# Altium PCB PCB_Bat.PcbDoc (part 2 of 2)
Units mm, origin at the board's own origin, x right, y up, seen from the top; angles counter-clockwise.
Board outline 154 x 85 mm, 2 copper layers (Top Layer, Bottom Layer); 134 components, 100 nets, 509 pads, 1285 vias.
Unrouted connection lines stored in the file: 8.
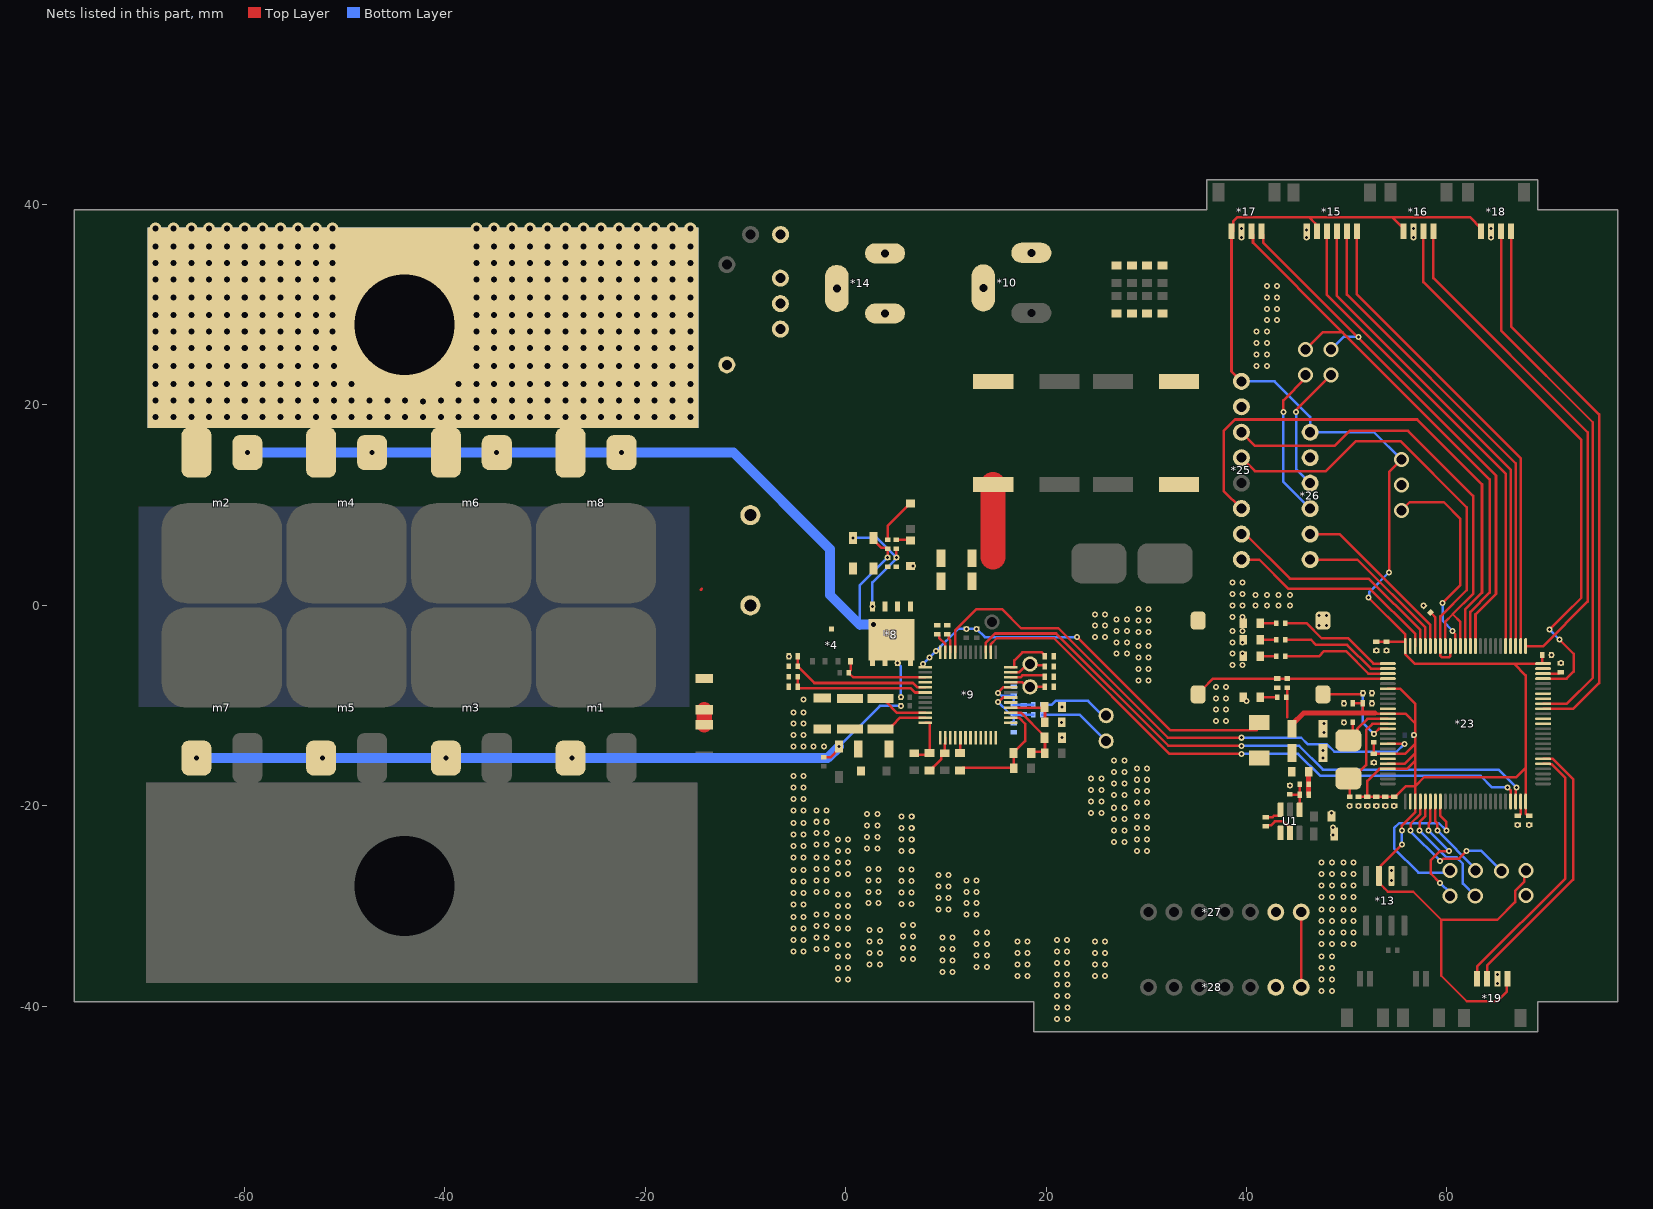
[diagram p2: the nets of this part, all layers, seen from the top]

## Via types
v1: diameter 1.2, hole 0.6, Top Layer to Bottom Layer, 768 vias
v2: diameter 0.6, hole 0.3, Top Layer to Bottom Layer, 477 vias
v3: diameter 1.5, hole 1, Top Layer to Bottom Layer, 20 vias
v4: diameter 1, hole 0.5, Top Layer to Bottom Layer, 9 vias
v5: diameter 3.5, hole 3, Top Layer to Bottom Layer, 6 vias
v6: diameter 1.27, hole 0.711, Top Layer to Bottom Layer, 5 vias

## Nets (pads, with @x,y where several pads share a name; then routed paths per layer and width w, separated by ;. In a path a pad name is that pad's centre, name@x,y a point inside that pad or via, vN(x,y) a via of type N, cw(c..) or ccw(c..) an arc to the next point about the centre after c; other vN are vias at no path point) (continued)
GND: *5.1 *9.17 *10.1 *10.2 *12.2 *13.2 *14.1 *14.2 *15.6 *16.3 *17.3 *18.3 *19.3 *21.2 *23.10 *23.20 *23.27 *23.74 *23.99 *25.2 *26.2 *27.1 *28.1 *29.2 C1.2 C2.2 C3.2 C4.2 C5.1 C6.1 C7.1 C8.1 C9.1 C10.1 C11.1 C12.1 C13.1 C14.2 C16.1 C18.1 C19.1 C22.2 C23.2 C25.1 C26.2 C27.1 C28.2 C29.1 C33.2 C35.1 C36.1 C37.1 C38.1 C39.1 C40.1 C41.1 C42.1 C43.1 C44.2 C45.1 C46.1 C47.1 C48.2 C49.1 C50.1 C51.1 C52.1 C53.1 C54.1 C55.1 C56.1 L2.1 L3.1 L4.1 L5.1 pad.8@45.466,-30.607 pad.8@45.466,-38.1 pad.9@-6.5,27.563 pad.9@-6.5,30.103 pad.9@-6.5,32.643 pad.9@-6.477,37 R16.1 R17.2 R24.1 RPH1.2 RPH2.1 U1.1 | length 14.7
  Top Layer w0.254: pad.8@45.466,-38.1 pad.8@45.466,-30.607
  Top Layer w2.5: 14.732,4.826 C1.2@14.732,12.065
  other v2: 21.108,-41.255 22.124,-41.255 21.108,-40.112 22.124,-40.112 21.108,-38.969 22.124,-38.969 47.498,-38.481 48.514,-38.481 21.108,-37.826 22.124,-37.826 65.024,-37.719 -0.762,-37.338 0.254,-37.338 47.498,-37.338 48.514,-37.338 17.145,-36.957 18.161,-36.957 24.892,-36.957 25.908,-36.957 21.082,-36.83 22.098,-36.83 65.024,-36.83 9.652,-36.576 10.668,-36.576 -0.762,-36.195 0.254,-36.195 47.498,-36.195 48.514,-36.195 13.081,-36.068 14.097,-36.068 2.413,-35.814 3.429,-35.814 17.145,-35.814 18.161,-35.814 24.892,-35.814 25.908,-35.814 21.082,-35.687 22.098,-35.687 9.652,-35.433 10.668,-35.433 5.715,-35.306 6.731,-35.306 -0.762,-35.052 0.254,-35.052 47.498,-35.052 48.514,-35.052 13.081,-34.925 14.097,-34.925 2.413,-34.671 3.429,-34.671 17.145,-34.671 18.161,-34.671 24.892,-34.671 25.908,-34.671 -5.207,-34.544 -4.191,-34.544 21.082,-34.544 22.098,-34.544 -2.921,-34.29 -1.905,-34.29 9.652,-34.29 10.668,-34.29 5.715,-34.163 6.731,-34.163 -0.762,-33.909 0.254,-33.909 13.081,-33.782 14.097,-33.782 47.498,-33.782 48.514,-33.782 49.657,-33.782 50.673,-33.782 2.413,-33.528 3.429,-33.528 17.145,-33.528 18.161,-33.528 24.892,-33.528 25.908,-33.528 -5.207,-33.401 -4.191,-33.401 21.082,-33.401 22.098,-33.401 -2.921,-33.147 -1.905,-33.147 9.652,-33.147 10.668,-33.147 5.715,-33.02 6.731,-33.02 13.081,-32.639 14.097,-32.639 47.498,-32.639 48.514,-32.639 49.657,-32.639 50.673,-32.639 2.413,-32.385 3.429,-32.385 -5.207,-32.258 -4.191,-32.258 -0.762,-32.258 0.254,-32.258 -2.921,-32.004 -1.905,-32.004 5.715,-31.877 6.731,-31.877 47.498,-31.496 48.514,-31.496 49.657,-31.496 50.673,-31.496 -5.207,-31.115 -4.191,-31.115 -0.762,-31.115 0.254,-31.115 -2.921,-30.861 -1.905,-30.861 12.065,-30.861 13.081,-30.861 9.271,-30.353 10.287,-30.353 47.498,-30.353 48.514,-30.353 49.657,-30.353 50.673,-30.353 -0.762,-29.972 0.254,-29.972 -5.207,-29.845 -4.191,-29.845 5.579,-29.805 6.595,-29.805 2.286,-29.718 3.302,-29.718 12.065,-29.718 13.081,-29.718 9.271,-29.21 10.287,-29.21 47.498,-29.083 48.514,-29.083 49.657,-29.083 50.673,-29.083 -0.762,-28.829 0.254,-28.829 -5.207,-28.702 -4.191,-28.702 5.579,-28.662 6.595,-28.662 -2.921,-28.575 -1.905,-28.575 2.286,-28.575 3.302,-28.575 12.065,-28.575 13.081,-28.575 9.271,-28.067 10.287,-28.067 47.498,-27.94 48.514,-27.94 49.657,-27.94 50.673,-27.94 -5.207,-27.559 -4.191,-27.559 5.579,-27.519 6.595,-27.519 -2.921,-27.432 -1.905,-27.432 2.286,-27.432 3.302,-27.432 12.065,-27.432 13.081,-27.432 54.483,-27.432 9.271,-26.924 10.287,-26.924 -0.762,-26.797 0.254,-26.797 47.498,-26.797 48.514,-26.797 49.657,-26.797 50.673,-26.797 54.489,-26.468 -5.207,-26.416 -4.191,-26.416 5.579,-26.376 6.595,-26.376 -2.921,-26.289 -1.905,-26.289 2.286,-26.289 3.302,-26.289 -0.762,-25.654 0.254,-25.654 47.498,-25.654 48.514,-25.654 49.657,-25.654 50.673,-25.654 -5.207,-25.146 -4.191,-25.146 -2.921,-25.146 -1.905,-25.146 -0.762,-24.511 0.254,-24.511 5.588,-24.511 6.604,-24.511 29.083,-24.511 30.099,-24.511 2.159,-24.257 3.175,-24.257 -5.207,-24.003 -4.191,-24.003 -2.921,-23.876 -1.905,-23.876 26.797,-23.622 27.813,-23.622 -0.762,-23.368 0.254,-23.368 5.588,-23.368 6.604,-23.368 29.083,-23.368 30.099,-23.368 2.159,-23.114 3.175,-23.114 48.65,-22.931 -5.207,-22.86 -4.191,-22.86 -2.921,-22.733 -1.905,-22.733 26.797,-22.479 27.813,-22.479 5.588,-22.225 6.604,-22.225 29.083,-22.225 30.099,-22.225 48.65,-22.169 2.159,-21.971 3.175,-21.971 67.056,-21.913 68.199,-21.913 -5.207,-21.717 -4.191,-21.717 -2.921,-21.59 -1.905,-21.59 26.797,-21.336 27.813,-21.336 5.588,-21.082 6.604,-21.082 29.083,-21.082 30.099,-21.082 2.159,-20.828 3.175,-20.828 24.511,-20.701 25.527,-20.701 48.5,-20.701 -5.207,-20.447 -4.191,-20.447 -2.921,-20.447 -1.905,-20.447 26.797,-20.193 27.813,-20.193 50.292,-20.008 51.181,-20.008 52.07,-20.008 52.959,-20.008 53.848,-20.008 54.737,-20.008 29.083,-19.685 30.099,-19.685 24.511,-19.558 25.527,-19.558 -5.207,-19.304 -4.191,-19.304 26.797,-18.923 27.813,-18.923 29.083,-18.542 30.099,-18.542 24.511,-18.415 25.527,-18.415 -5.207,-18.161 -4.191,-18.161 44.323,-17.965 26.797,-17.78 27.813,-17.78 29.083,-17.399 30.099,-17.399 24.511,-17.272 25.527,-17.272 -5.207,-17.018 -4.191,-17.018 26.797,-16.637 27.813,-16.637 29.083,-16.256 30.099,-16.256 52.705,-15.69 26.797,-15.494 27.813,-15.494 47.625,-15.24 47.625,-14.47 -5.207,-14.097 -4.191,-14.097 -3.175,-14.097 -2.159,-14.097 21.576,-13.208 -5.207,-12.954 -4.191,-12.954 47.752,-12.7 -5.207,-11.811 -4.191,-11.811 47.752,-11.811 21.551,-11.684 49.715,-11.684 36.957,-11.557 37.973,-11.557 -5.207,-10.668 -4.191,-10.668 36.957,-10.414 37.973,-10.414 21.576,-10.16 49.715,-9.779 52.52,-9.779 40.005,-9.525 -4.191,-9.398 36.957,-9.271 37.973,-9.271 52.52,-8.763 36.957,-8.128 37.973,-8.128 29.21,-7.493 30.226,-7.493 29.21,-6.35 30.226,-6.35 38.608,-5.969 39.624,-5.969 71.374,-5.773 29.21,-5.207 30.226,-5.207 -5.657,-5.08 70.427,-4.953 27.051,-4.826 28.067,-4.826 38.608,-4.826 39.624,-4.826 52.959,-4.514 53.975,-4.514 29.21,-4.064 30.226,-4.064 27.051,-3.683 28.067,-3.683 38.608,-3.683 39.624,-3.683 24.892,-3.175 25.908,-3.175 29.21,-2.667 30.226,-2.667 27.051,-2.54 28.067,-2.54 38.608,-2.54 39.624,-2.54 24.892,-2.032 25.908,-2.032 47.244,-2.032 48.006,-2.032 29.21,-1.524 30.226,-1.524 27.051,-1.397 28.067,-1.397 38.608,-1.143 39.624,-1.143 47.244,-1.016 48.006,-1.016 24.892,-0.889 25.908,-0.889 29.21,-0.381 30.226,-0.381 38.608,0 39.624,0 40.894,0 42.037,0 43.18,0 44.323,0 57.658,0 40.894,1.016 42.037,1.016 43.18,1.016 44.323,1.016 38.608,1.143 39.624,1.143 38.608,2.286 39.624,2.286 6.731,3.937 41.021,23.876 42.037,23.876 41.021,25.019 42.037,25.019 41.021,26.162 42.037,26.162 41.021,27.305 42.037,27.305 42.037,28.448 43.053,28.448 42.037,29.591 43.053,29.591 42.037,30.734 43.053,30.734 42.037,31.877 43.053,31.877 39.497,36.703 45.974,36.703 56.642,36.703 64.389,36.703 45.974,37.465 39.497,37.592 56.642,37.592 64.389,37.592
  other v3: 67.873,-28.967 55.446,12
I2C1_SCL/SPI1_SCK: *23.89 *23.92 *25.3 | length 46.6
  Top Layer w0.254: *25.3@39.497,17.272 40.86,15.909 48.802,15.909 50.292,17.399 56.134,17.399 62.611,10.922 62.611,1.15 60.579,-0.882 60.579,-0.889 ; *23.92@59.849,-4.061 59.849,-1.619 60.579,-0.889 ; *23.89@61.349,-4.061 61.349,-1.659 60.579,-0.889
I2C1_SDA/SPI1_MOSI: *23.91 *23.93 *25.4 | length 45
  Top Layer w0.254: *25.4@39.497,14.732 40.842,13.387 47.931,13.387 50.927,16.383 55.372,16.383 61.976,9.779 61.976,1.524 59.349,-1.103 *23.93@59.349,-4.061 59.349,-5.04 59.498,-5.189 60.195,-5.189 60.344,-5.04 60.344,-4.066 *23.91@60.349,-4.061
I2C2_SCL: *9.26 *23.47 | length 60.3
  Top Layer w0.254: *9.26@14.468,-4.669 14.468,-3.9 15.085,-3.283 20.816,-3.283 32.341,-14.808 v2(39.497,-14.808) ; v2(66.04,-18.161) 66.349,-18.47 *23.47@66.349,-19.561
  Bottom Layer w0.254: v2(39.497,-14.808) 45.161,-14.808 47.371,-17.018 63.373,-17.018 64.516,-18.161 v2(66.04,-18.161)
I2C2_SDA: *9.27 *23.48 | length 62.1
  Top Layer w0.254: *9.27@13.968,-4.669 13.968,-3.758 14.919,-2.807 21.013,-2.807 32.214,-14.008 v2(39.497,-14.008) ; *23.48@66.849,-19.561 66.849,-18.335 66.929,-18.255 v2(66.929,-18.161)
  Bottom Layer w0.254: v2(39.497,-14.008) 45.25,-14.008 47.625,-16.383 65.151,-16.383 v2(66.929,-18.161)
I2C3_SCL: *18.2 *23.67 | length 54.2
  Top Layer w0.254: *18.2@65.403,37.141 65.403,27.417 74.549,18.271 74.549,-7.239 71.977,-9.811 *23.67@69.599,-9.811
I2C3_SDA: *18.1 *23.66 | length 55.2
  Top Layer w0.254: *18.1@66.403,37.141 66.403,27.831 75.184,19.05 75.184,-7.747 72.62,-10.311 *23.66@69.599,-10.311
INT: *23.95 *26.5 | length 17.9
  Top Layer w0.254: *26.5@46.355,7.112 49.276,7.112 58.349,-1.961 *23.95@58.349,-4.061
INT1: *23.97 *25.7 | length 23.4
  Top Layer w0.254: *25.7@39.497,7.112 39.878,7.112 44.323,2.667 52.197,2.667 57.344,-2.48 57.344,-4.056 *23.97@57.349,-4.061
INT2: *23.98 *25.8 | length 21.6
  Top Layer w0.254: *25.8@39.497,4.572 41.275,4.572 44.196,1.651 52.324,1.651 56.844,-2.869 56.844,-4.056 *23.98@56.849,-4.061
IRQ: *23.33 | length 17.6
  Top Layer w0.254: *23.33@59.349,-19.561 59.349,-21.012 59.944,-21.607 v2(59.944,-22.479)
  Bottom Layer w0.254: v2(59.944,-22.479) 59.182,-21.717 55.245,-21.717 54.737,-22.225 54.737,-24.257 57.15,-26.67 60.115,-26.67 v3(60.325,-26.46)
KEY1: *23.4 *29.1 C56.2 R30.2 | length 19
  Top Layer w0.254: *29.1@35.587,-8.398 36.674,-7.311 *23.4@54.099,-7.311
L2: *23.3 R27.2 | length 11.4
  Top Layer w0.254: R27.2@43.884,-5.08 47.244,-5.08 47.752,-4.572 49.911,-4.572 52.15,-6.811 *23.3@54.099,-6.811
L3: *23.2 R29.1 | length 11.4
  Top Layer w0.254: R29.1@43.884,-3.429 46.438,-3.429 46.946,-3.937 50.038,-3.937 52.412,-6.311 *23.2@54.099,-6.311
L4: *23.1 R31.1 | length 11.9
  Top Layer w0.254: R31.1@43.884,-1.778 45.986,-1.778 47.51,-3.302 50.165,-3.302 52.674,-5.811 *23.1@54.099,-5.811
LD: *9.41 C16.2 R12.1 | length 14.6
  Top Layer w0.254: R12.1@-4.757,-6.146 -4.659,-6.244 -4.609,-6.244 -3.106,-7.747 6.73,-7.747 7.175,-8.192 *9.41@7.944,-8.192 ; R12.1@-4.757,-6.096 C16.2@-4.757,-5.08
Net*1_2: *1.2 R1.2 | length 4.6
  Top Layer w0.254: R1.2@4.191,6.546 4.191,7.924 6.427,10.16 *1.2@6.477,10.16
Net*2_1: *2.1 R4.1
Net*3_1: *3.1 *8.2 m2.G m4.G m6.G m8.G R1.1 R2.1 R3.2 | length 86.9
  Top Layer w0.254: *3.1@2.794,6.731 2.794,6.531 3.581,5.744 4.093,5.744 R1.1@4.191,5.646 v2(4.191,4.768)
  Bottom Layer w0.254: 1.397,-2.314 1.397,1.974 v2(4.191,4.768) ; v2(5.207,-5.764) 5.207,-5.774 5.519,-6.086 v2(5.519,-9.144)
  Bottom Layer w1: v4(-59.69,15.24) v4(-22.352,15.24) -11.176,15.24 -1.541,5.605 -1.541,1.033 1.397,-1.905 v4(2.794,-1.905)
  other v4: -47.249,15.253 -34.803,15.253
Net*5_2: *5.2 *9.47 *11.2 C13.2 R4.2 | length 5
  Top Layer w0.254: *11.2@3.498,-12.573 4.094,-12.573 4.671,-11.996 4.671,-11.966 5.444,-11.193 *9.47@7.944,-11.193
Net*6_1: *6.1 m1.G m3.G m5.G m7.G R5.2 R6.2 | length 74.5
  Top Layer w0.254: R6.2@-2.159,-15.171 -2.153,-15.165 -1.503,-15.165 -0.635,-14.297 v2(-0.635,-14.097)
  Bottom Layer w0.254: v4(-64.775,-15.227) v4@-64.768,-15.234 ; v4@-27.311,-15.234 v4(-27.305,-15.24) ; v2(-0.635,-14.097) 3.429,-10.033 v2(5.519,-10.033)
  Bottom Layer w1: v4@-64.768,-15.234 v4@-27.311,-15.234 ; v4(-27.305,-15.24) -1.778,-15.24 v2(-0.635,-14.097)
  other v4: -52.202,-15.227 -39.883,-15.227
Net*7_1: *7.1 *8.1 R7.1 R9.2 | length 11.8
  Top Layer w0.254: v2(5.08,4.768) R9.2@5.08,5.646
  Bottom Layer w0.254: v2(0.762,6.731) 3.117,6.731 v2(5.08,4.768) ; v2@2.667,-0.129 2.667,2.286 v2@5.076,4.695
  other v2: 2.667,-0.096
Net*9_1: *9.1 *9.2 *9.3 *9.4 *9.5 *9.6 *9.7 *9.8 *9.9 *9.10 *9.11 *9.12 *9.13 C15.2 C17.2 R10.2 | length 5.8
  Top Layer w0.254: C15.2@8.382,-16.496 8.482,-16.496 8.755,-16.223 8.755,-16.123 9.558,-15.32 9.558,-15.019 9.704,-14.873 9.906,-14.873 9.906,-13.829 9.967,-13.769 *9.2@9.967,-13.216 ; C17.2@11.43,-14.898 11.43,-13.806 11.467,-13.769 *9.5@11.467,-13.216
Net*9_14: *9.14 C17.1 C24.2 R14.2 | length 12
  Top Layer w0.254: C17.1@11.43,-16.496 11.703,-16.223 16.709,-16.223 16.803,-16.129 16.803,-14.63 C24.2@16.778,-14.605 ; *9.14@16.491,-11.193 17.289,-11.193 17.907,-11.811 17.907,-13.537 C24.2@16.843,-14.6
Net*9_15: *9.15 C24.1 C25.2 R15.2 | length 7.2
  Top Layer w0.254: *9.15@16.491,-10.693 17.503,-10.693 19.874,-13.063 19.874,-13.163 19.899,-13.188 19.899,-14.6 C24.1@18.593,-14.6
Net*9_16: *9.16 C27.2 R16.2 | length 4.9
  Top Layer w0.254: *9.16@16.491,-10.193 19.777,-10.193 19.899,-10.315 R16.2@19.899,-11.726
Net*9_24: *9.24 C39.2 | length 4.6
  Top Layer w0.254: *9.24@16.491,-6.192 16.85,-6.192 16.85,-5.502 17.653,-4.699 19.584,-4.699 19.87,-4.985 C39.2@19.87,-5.08
Net*9_34: *9.34 C23.1 | length 2
  Top Layer w0.254: C23.1@10.16,-2.863 10.194,-2.863 10.292,-2.961 10.292,-3.307 10.467,-3.482 *9.34@10.467,-4.669
Net*9_35: *9.35 C22.1 | length 2.2
  Top Layer w0.254: C22.1@9.144,-2.863 9.239,-2.863 9.337,-2.961 9.337,-3.241 9.967,-3.871 *9.35@9.967,-4.669
Net*9_46: *9.46 *11.1 | length 4.6
  Top Layer w0.254: *11.1@4.064,-9.398 4.064,-9.652 5.105,-10.693 *9.46@7.944,-10.693
Net*9_48: *9.48 C15.1 R11.1 | length 5.2
  Top Layer w0.254: R11.1@6.858,-14.898 8.357,-14.898 8.382,-14.873 8.382,-11.693 *9.48@7.944,-11.693
Net*12_1: *12.1 R9.1 | length 1.4
  Top Layer w0.254: R9.1@5.08,6.546 6.408,6.546 *12.1@6.477,6.477
Net*21_1: *21.1 *23.14 C48.1 R25.1 | length 10.2
  Top Layer w0.254: *21.1@47.625,-8.89 51.522,-8.89 51.62,-8.792 v2(51.62,-8.763) ; R25.1@52.705,-12.808 52.853,-12.66 52.872,-12.66 53.216,-12.316 54.094,-12.316 *23.14@54.099,-12.311
  Bottom Layer w0.254: v2(51.62,-8.763) 51.62,-11.742 v2(52.705,-12.827)
Net*23_49: *23.49 C42.2 | length 1.6
  Top Layer w0.254: C42.2@67.056,-21.013 67.151,-21.013 67.349,-20.815 *23.49@67.349,-19.561
Net*23_73: *23.73 C43.2 | length 1.8
  Top Layer w0.254: *23.73@69.599,-6.811 71.141,-6.811 71.279,-6.673 C43.2@71.374,-6.673
Net*23_94: *23.94 R24.2 | length 3.4
  Top Layer w0.254: R24.2@58.484,-0.826 58.849,-1.191 *23.94@58.849,-4.061
NetC20_2: C20.2 C21.1 | length 1.5
  Top Layer w1.5: C21.1@-14.097,-11.912 C20.2@-14.097,-10.414
NetC30_1: C30.1 R21.1 R23.1 | length 2.3
  Top Layer w0.254: C30.1@46.203,-18.887 C30.1@46.212,-18.878
  Top Layer w0.5: C30.1@46.212,-18.878 R23.1@46.212,-16.611
NetC30_2: C30.2 R17.1 R21.2 U1.4 | length 3.1
  Top Layer w0.254: R17.1@44.323,-18.865 44.334,-18.876 45.293,-18.876 C30.2@45.303,-18.887 ; R21.2@45.303,-17.871 45.304,-17.873 C30.2@45.303,-18.887 ; U1.4@45.363,-19.997 45.304,-19.939 C30.2@45.303,-18.887
NetC34_1: C34.1 L1.2 U1.2 | length 3.4
  Top Layer w0.254: C34.1@41.93,-22.041 42.028,-21.943 42.443,-21.943 42.832,-21.554 43.69,-21.554 44.188,-22.052 44.188,-22.541 U1.2@44.356,-22.709
NetC34_2: C34.2 U1.6 | length 2
  Top Layer w0.254: C34.2@41.93,-21.141 42.603,-21.141 42.747,-20.997 43.238,-20.997 43.406,-20.829 U1.6@43.406,-20.399
NetL2_2: L2.2 R26.2 | length 1.8
  Top Layer w0.254: L2.2@41.363,-9.271 41.457,-9.177 R26.2@43.086,-9.177
NetL3_2: L3.2 R27.1 | length 1.6
  Top Layer w0.254: L3.2@41.363,-5.08 R27.1@42.984,-5.08
NetL4_2: L4.2 R29.2 | length 1.6
  Top Layer w0.254: L4.2@41.363,-3.429 R29.2@42.984,-3.429
NetL5_2: L5.2 R31.2 | length 1.7
  Top Layer w0.254: L5.2@41.363,-1.778 R31.2@43.07,-1.778
OUT+: *3.2 *7.2 *8.3 *14.3 C18.2 C19.2 C20.1 m2.S m4.S m6.S m8.S pad.2@-42.164,27.686 pad.7@-9.5,9 pad.9@-11.845,24 pad.9@-44,28 R3.1 R7.2 R12.2 R13.2 | length 0.1
  Top Layer w0.254: -14.422,1.58 -14.351,1.651
  other v1: -68.834,18.796 -67.056,18.796 -65.278,18.796 -63.5,18.796 -61.722,18.796 -59.944,18.796 -58.166,18.796 -56.388,18.796 -54.61,18.796 -52.832,18.796 -51.054,18.796 -49.276,18.796 -47.498,18.796 -45.72,18.796 -43.942,18.796 -42.164,18.796 -40.386,18.796 -38.608,18.796 -36.83,18.796 -35.052,18.796 -33.274,18.796 -31.496,18.796 -29.718,18.796 -27.94,18.796 -26.162,18.796 -24.384,18.796 -22.606,18.796 -20.828,18.796 -19.05,18.796 -17.272,18.796 -15.494,18.796 -42.164,20.32 -68.834,20.447 -67.056,20.447 -65.278,20.447 -63.5,20.447 -61.722,20.447 -59.944,20.447 -58.166,20.447 -56.388,20.447 -54.61,20.447 -52.832,20.447 -51.054,20.447 -49.276,20.447 -47.498,20.447 -45.72,20.447 -43.942,20.447 -40.386,20.447 -38.608,20.447 -36.83,20.447 -35.052,20.447 -33.274,20.447 -31.496,20.447 -29.718,20.447 -27.94,20.447 -26.162,20.447 -24.384,20.447 -22.606,20.447 -20.828,20.447 -19.05,20.447 -17.272,20.447 -15.494,20.447 -68.834,22.098 -67.056,22.098 -65.278,22.098 -63.5,22.098 -61.722,22.098 -59.944,22.098 -58.166,22.098 -56.388,22.098 -54.61,22.098 -52.832,22.098 -51.054,22.098 -49.276,22.098 -38.608,22.098 -36.83,22.098 -35.052,22.098 -33.274,22.098 -31.496,22.098 -29.718,22.098 -27.94,22.098 -26.162,22.098 -24.384,22.098 -22.606,22.098 -20.828,22.098 -19.05,22.098 -17.272,22.098 -15.494,22.098 -68.834,23.876 -67.056,23.876 -65.278,23.876 -63.5,23.876 -61.722,23.876 -59.944,23.876 -58.166,23.876 -56.388,23.876 -54.61,23.876 -52.832,23.876 -51.054,23.876 -36.83,23.876 -35.052,23.876 -33.274,23.876 -31.496,23.876 -29.718,23.876 -27.94,23.876 -26.162,23.876 -24.384,23.876 -22.606,23.876 -20.828,23.876 -19.05,23.876 -17.272,23.876 -15.494,23.876 -68.834,25.654 -67.056,25.654 -65.278,25.654 -63.5,25.654 -61.722,25.654 -59.944,25.654 -58.166,25.654 -56.388,25.654 -54.61,25.654 -52.832,25.654 -51.054,25.654 -36.83,25.654 -35.052,25.654 -33.274,25.654 -31.496,25.654 -29.718,25.654 -27.94,25.654 -26.162,25.654 -24.384,25.654 -22.606,25.654 -20.828,25.654 -19.05,25.654 -17.272,25.654 -15.494,25.654 -68.834,27.305 -67.056,27.305 -65.278,27.305 -63.5,27.305 -61.722,27.305 -59.944,27.305 -58.166,27.305 -56.388,27.305 -54.61,27.305 -52.832,27.305 -51.181,27.305 -36.83,27.305 -35.052,27.305 -33.274,27.305 -31.496,27.305 -29.718,27.305 -27.94,27.305 -26.162,27.305 -24.384,27.305 -22.606,27.305 -20.828,27.305 -19.05,27.305 -17.272,27.305 -15.494,27.305 -68.834,28.956 -67.056,28.956 -65.278,28.956 -63.5,28.956 -61.722,28.956 -59.944,28.956 -58.166,28.956 -56.388,28.956 -54.61,28.956 -52.832,28.956 -51.181,28.956 -36.83,28.956 -35.052,28.956 -33.274,28.956 -31.496,28.956 -29.718,28.956 -27.94,28.956 -26.162,28.956 -24.384,28.956 -22.606,28.956 -20.828,28.956 -19.05,28.956 -17.272,28.956 -15.494,28.956 -68.834,30.734 -67.056,30.734 -65.278,30.734 -63.5,30.734 -61.722,30.734 -59.944,30.734 -58.166,30.734 -56.388,30.734 -54.61,30.734 -52.832,30.734 -51.181,30.734 -36.83,30.734 -35.052,30.734 -33.274,30.734 -31.496,30.734 -29.718,30.734 -27.94,30.734 -26.162,30.734 -24.384,30.734 -22.606,30.734 -20.828,30.734 -19.05,30.734 -17.272,30.734 -15.494,30.734 -68.834,32.512 -67.056,32.512 -65.278,32.512 -63.5,32.512 -61.722,32.512 -59.944,32.512 -58.166,32.512 -56.388,32.512 -54.61,32.512 -52.832,32.512 -51.181,32.512 -36.83,32.512 -35.052,32.512 -33.274,32.512 -31.496,32.512 -29.718,32.512 -27.94,32.512 -26.162,32.512 -24.384,32.512 -22.606,32.512 -20.828,32.512 -19.05,32.512 -17.272,32.512 -15.494,32.512 -68.834,34.163 -67.056,34.163 -65.278,34.163 -63.5,34.163 -61.722,34.163 -59.944,34.163 -58.166,34.163 -56.388,34.163 -54.61,34.163 -52.832,34.163 -51.181,34.163 -36.83,34.163 -35.052,34.163 -33.274,34.163 -31.496,34.163 -29.718,34.163 -27.94,34.163 -26.162,34.163 -24.384,34.163 -22.606,34.163 -20.828,34.163 -19.05,34.163 -17.272,34.163 -15.494,34.163 -68.834,35.814 -67.056,35.814 -65.278,35.814 -63.5,35.814 -61.722,35.814 -59.944,35.814 -58.166,35.814 -56.388,35.814 -54.61,35.814 -52.832,35.814 -51.181,35.814 -36.83,35.814 -35.052,35.814 -33.274,35.814 -31.496,35.814 -29.718,35.814 -27.94,35.814 -26.162,35.814 -24.384,35.814 -22.606,35.814 -20.828,35.814 -19.05,35.814 -17.272,35.814 -15.494,35.814 -68.834,37.592 -67.056,37.592 -65.278,37.592 -63.5,37.592 -61.722,37.592 -59.944,37.592 -58.166,37.592 -56.388,37.592 -54.61,37.592 -52.832,37.592 -51.181,37.592 -36.83,37.592 -35.052,37.592 -33.274,37.592 -31.496,37.592 -29.718,37.592 -27.94,37.592 -26.162,37.592 -24.384,37.592 -22.606,37.592 -20.828,37.592 -19.05,37.592 -17.272,37.592 -15.494,37.592
PACK: *9.42 C14.1 R13.1 | length 13.8
  Top Layer w0.254: C14.1@-4.757,-8.128 R13.1@-4.757,-7.112 ; C14.1@-4.699,-8.255 6.492,-8.255 6.93,-8.693 *9.42@7.944,-8.693
PCHG: *9.40
PDSG: *4.4 *9.39 R8.2 | length 9
  Top Layer w0.254: R8.2@0.323,-6.781 0.421,-6.879 0.471,-6.879 0.784,-7.192 *9.39@7.944,-7.192 ; R8.2@0.323,-6.731 0.323,-6.681 0.508,-6.496 *4.4@0.508,-5.588
PH0: *23.12 *24.1 RPH1.1 | length 7.1
  Top Layer w0.254: *24.1@50.165,-13.589 50.615,-13.139 *24.1@50.615,-12.758 ; *24.1@50.165,-13.462 50.165,-13.208 *24.1@50.615,-12.758 ; RPH1.1@50.615,-11.811 *24.1@50.615,-12.758 ; *23.12@54.099,-11.311 54.094,-11.316 52.057,-11.316 51.077,-12.296 51.077,-12.521 50.84,-12.758 *24.1@50.615,-12.758
PH1: *23.13 *24.2 RPH2.2 | length 9.9
  Top Layer w0.254: RPH2.2@50.292,-19.108 50.292,-17.399 50.492,-17.399 51.943,-15.948 51.943,-12.446 52.573,-11.816 54.094,-11.816 *23.13@54.099,-11.811
PS: *23.96 *26.6 | length 16.1
  Top Layer w0.254: *26.6@46.355,4.572 51.054,4.572 57.849,-2.223 *23.96@57.849,-4.061
res10w: *4.5_8 pad.7@-9.5,0
RST_SHUT: *9.33 *23.17 | length 55.7
  Top Layer w0.254: *9.33@10.967,-4.669 10.967,-2.479 13.066,-0.381 15.621,-0.381 17.526,-2.286 21.229,-2.286 32.151,-13.208 v2(39.497,-13.208) ; *23.17@54.099,-13.811 54.104,-13.816 55.726,-13.816 v2(55.753,-13.843)
  Bottom Layer w0.254: v2(39.497,-13.208) 45.466,-13.208 46.101,-13.843 48.004,-13.843 48.766,-14.605 54.991,-14.605 v2(55.753,-13.843)
SA0/SPI1_MISO: *23.90 | length 20.9
  Top Layer w0.254: v3(55.446,9.46) 56.273,10.287 59.69,10.287 61.341,8.636 61.341,2.032 v2(59.563,0.254) ; v2(60.579,-2.54) 60.579,-2.61 60.849,-2.88 *23.90@60.849,-4.061
  Bottom Layer w0.254: v2(59.563,0.254) 59.563,-1.524 v2(60.579,-2.54)
SHUTN: pad.8@26,-11 pad.8@26,-13.54 R18.1 R22.1 | length 14.9
  Bottom Layer w0.254: R18.1@19.627,-10.922 23.382,-10.922 pad.8@26,-13.54 ; R22.1@19.627,-9.906 20.594,-9.906 20.967,-9.533 24.189,-9.533 25.705,-11.049 pad.8@26.289,-11.049
SPI1_MISO: *23.31 | length 12.4
  Top Layer w0.254: v2(58.166,-22.479) 58.166,-21.75 58.349,-21.567 *23.31@58.349,-19.561 ; v2(59.309,-27.686) 58.398,-26.775 58.398,-25.422 59.309,-24.511 v2(60.198,-24.511)
  Bottom Layer w0.254: v2(58.166,-22.479) v2(60.198,-24.511) ; v2(59.309,-27.686) 60.286,-28.663 v3(60.286,-29)
SPI1_MOSI: *23.32 | length 8.7
  Top Layer w0.254: *23.32@58.849,-19.561 58.849,-21.544 59.055,-21.75 v2(59.055,-22.479)
  Bottom Layer w0.254: v2(59.055,-22.479) 62.865,-26.289 v3@62.865,-26.608
  other v3: 62.852,-26.46
SPI1_NSS: *23.29 *23.88 *25.6 | length 69.2
  Top Layer w0.254: *25.6@39.497,9.652 37.719,11.43 37.719,17.399 38.862,18.542 57.023,18.542 63.5,12.065 63.5,1.27 61.849,-0.381 *23.88@61.849,-4.061 ; v2(56.388,-22.479) 56.388,-21.79 57.349,-20.829 *23.29@57.349,-19.561 ; v2(59.309,-25.527) 59.403,-25.527 59.657,-25.273 61.205,-25.273 v2(61.974,-24.505)
  Bottom Layer w0.254: v2(56.388,-22.479) 56.388,-22.542 59.309,-25.463 v2(59.309,-25.527) ; v2(61.974,-24.505) 63.429,-24.505 v3(65.449,-26.524)
SPI1_SCK: *23.30 | length 12.6
  Top Layer w0.254: v2(57.277,-22.479) 57.277,-21.595 57.849,-21.023 *23.30@57.849,-19.561
  Bottom Layer w0.254: v2(57.277,-22.479) 59.944,-25.146 60.96,-25.146 61.595,-25.781 61.595,-27.769 v3(62.826,-29)
SPI3_MISO: *15.3 *23.79 | length 48.3
  Top Layer w0.254: *15.3@49.014,37.084 49.014,30.869 66.349,13.534 *23.79@66.349,-4.061
SPI3_MOSI: *15.4 *23.80 | length 48.5
  Top Layer w0.254: *15.4@48.014,37.084 48.014,30.98 65.849,13.145 *23.80@65.849,-4.061
SPI3_NSS: *15.1 *23.77 | length 47.9
  Top Layer w0.254: *15.1@51.014,37.084 51.014,31.028 67.349,14.693 *23.77@67.349,-4.061
SPI3_SCK: *15.2 *23.78 | length 48.1
  Top Layer w0.254: *15.2@50.014,37.084 50.014,31.012 66.849,14.177 *23.78@66.849,-4.061
SRN: *9.20 C31.1 C32.1 C37.2 R22.2 | length 6.1
  Top Layer w0.254: v2(15.212,-8.755) 15.212,-8.702 15.722,-8.192 *9.20@16.491,-8.192
  Bottom Layer w0.254: v2(15.212,-8.755) 15.306,-8.755 15.568,-9.017 C37.2@16.764,-9.017 C32.1@16.764,-9.964 16.793,-9.935 18.698,-9.935 R22.2@18.727,-9.906
SRP: *9.18 C26.1 C31.2 C32.2 R18.2 | length 6.3
  Top Layer w0.254: v2(15.212,-9.644) 15.271,-9.644 15.722,-9.193 *9.18@16.491,-9.193
  Bottom Layer w0.254: v2(15.212,-9.644) 16.334,-10.766 16.666,-10.766 C32.2@16.764,-10.864 ; C26.1@16.764,-11.742 16.764,-10.922 16.793,-10.893 17.78,-10.893 18.698,-10.893 R18.2@18.727,-10.922
SWCLK: *16.1 *23.76 | length 51.2
  Top Layer w0.254: *16.1@58.65,37.141 58.65,32.663 74.041,17.272 74.041,0.364 69.616,-4.061 *23.76@67.849,-4.061
SWDIO: *16.2 *23.72 | length 55.9
  Top Layer w0.254: *16.2@57.65,37.141 57.65,32.249 73.406,16.493 73.406,0.762 71.788,-0.856 v2(70.231,-2.413) ; *23.72@69.599,-7.311 71.937,-7.311 72.644,-6.604 72.644,-4.826 v2(71.247,-3.429)
  Bottom Layer w0.254: v2(70.231,-2.413) v2(71.247,-3.429)
TS1: *9.21 C35.2 pad.8@18.415,-8.128 | length 3.6
  Top Layer w0.254: *9.21@16.491,-7.692 17.636,-7.692 18.071,-8.128 pad.8@18.415,-8.128 C35.2@19.87,-8.128
TS2: *9.22 C36.2 | length 3.5
  Top Layer w0.254: *9.22@16.491,-7.192 17.446,-7.192 17.653,-6.985 19.772,-6.985 19.87,-7.083 C36.2@19.87,-7.112
TS3: *9.23 C38.2 pad.8@18.415,-5.842 | length 3.9
  Top Layer w0.254: *9.23@16.491,-6.692 17.304,-6.692 18.154,-5.842 pad.8@18.415,-5.842 18.542,-5.969 19.772,-5.969 19.87,-6.067 C38.2@19.87,-6.096
USART1_RX: *23.69
USART1_TX: *23.68
USART2_RX: *17.1 *23.86 *26.3 | length 67.8
  Top Layer w0.254: *17.1@41.505,37.141 41.66,36.986 41.66,36.191 64.897,12.954 64.897,1.143 62.849,-0.905 *23.86@62.849,-4.061 ; v2(44.958,19.304) 45.024,19.37 45.024,19.578 v3(48.446,23)
  Bottom Layer w0.254: v2(44.958,19.304) 44.958,13.589 *26.3@46.355,12.192 ; v3(48.446,25.54) 49.703,26.797 v2(51.181,26.797)
USART2_TX: *17.2 *23.87 *26.4 | length 71.6
  Top Layer w0.254: *17.2@40.505,37.141 40.652,36.994 40.652,36.183 49.593,27.241 ; v2(43.688,19.304) 43.688,20.447 45.906,22.665 v3(45.906,23) ; v3(45.906,25.54) 47.607,27.241 49.593,27.241 ; *23.87@62.349,-4.061 62.349,-0.643 64.262,1.27 64.262,12.573 49.593,27.241
  Bottom Layer w0.254: v2(43.688,19.304) 43.688,12.319 *26.4@46.355,9.652
USART3_RX: *19.2 *23.56 | length 27
  Top Layer w0.254: *19.2@64.008,-36.957 64.008,-35.941 72.59,-27.359 72.59,-17.34 70.566,-15.316 69.604,-15.316 *23.56@69.599,-15.311
USART3_TX: *19.1 *23.55 | length 26.5
  Top Layer w0.254: *19.1@63.022,-37.273 63.022,-36.038 71.828,-27.232 71.828,-17.22 70.452,-15.844 70.31,-15.844 70.299,-15.844 70.266,-15.811 *23.55@69.599,-15.811
USART6_RX: *23.64
USART6_TX: *23.63
VCC_3V: *9.36 *9.37 *13.3 *15.5 *16.4 *17.4 *18.4 *19.4 *23.6 *23.11 *23.19 *23.21 *23.22 *23.28 *23.50 *23.75 *23.100 *25.1 *26.1 C33.1 C40.2 C41.2 C44.1 C45.2 C46.2 C47.2 C49.2 C50.2 C51.2 C52.2 C53.2 C54.2 C55.2 L1.1 R19.2 R20.2 R23.2 R25.2 R26.1 R30.1 R32.2 | length 269.7
  Top Layer w0.254: v2(23.114,-3.175) 32.385,-12.446 41.021,-12.446 ; *25.1@39.497,22.352 38.505,23.344 38.505,37.141 38.678,37.314 38.678,38.297 39.116,38.735 46.228,38.735 ; 44.069,-11.176 44.069,-8.451 ; C41.2@44.551,-12.319 C41.2@44.551,-11.894 ; *15.5@47.014,37.084 46.863,37.235 46.863,38.1 46.228,38.735 ; C33.1@50.615,-9.779 C49.2@51.62,-9.779 51.62,-10.67 51.689,-10.739 ; C47.2@51.181,-19.108 C46.2@52.07,-19.108 ; v2(52.197,0.762) 55.849,-2.89 *23.100@55.849,-3.614 ; C50.2@52.705,-14.79 R25.2@52.705,-13.658 ; 52.848,-10.739 52.92,-10.811 *23.11@54.099,-10.811 55.849,-10.811 56.849,-11.811 ; C50.2@52.948,-14.811 *23.19@54.099,-14.811 55.801,-14.811 56.849,-13.763 ; C54.2@52.959,-3.614 C55.2@53.975,-3.614 55.837,-3.614 55.849,-3.626 *23.100@55.849,-4.061 55.854,-4.066 55.854,-4.886 56.779,-5.811 66.675,-5.811 ; *13.3@53.213,-27.679 53.745,-28.211 53.745,-28.218 54.102,-28.575 56.642,-28.575 59.436,-31.369 ; *13.3@53.213,-26.994 53.386,-26.821 53.386,-25.989 v2(55.499,-23.876) ; *23.21@54.099,-15.811 55.77,-15.811 56.849,-14.732 ; *23.6@54.099,-8.311 54.104,-8.316 55.306,-8.316 56.849,-9.859 56.849,-11.811 ; v2(54.229,3.302) 54.229,13.323 v3(55.446,14.54) ; C51.2@54.737,-19.108 C44.1@53.848,-19.108 C45.2@52.959,-19.108 C46.2@52.07,-19.108 ; C51.2@54.832,-19.108 55.906,-18.034 56.849,-18.034 ; v2(55.499,-22.479) 55.499,-21.971 56.844,-20.626 56.844,-19.566 *23.28@56.849,-19.561 56.849,-18.034 ; *16.4@55.65,37.141 55.65,37.616 55.477,37.789 54.531,38.735 ; *18.4@63.403,37.141 63.403,37.616 62.284,38.735 54.531,38.735 ; *19.4@66.022,-37.273 65.954,-37.341 65.954,-38.567 65.024,-39.497 61.976,-39.497 59.436,-36.957 59.436,-31.369 ; v3(67.906,-26.46) 67.7,-26.666 67.7,-27.591 66.796,-28.495 66.796,-29.597 65.024,-31.369 59.436,-31.369 ; C52.2@68.199,-21.013 68.101,-20.915 67.998,-20.915 67.849,-20.766 *23.50@67.849,-19.561 67.849,-16.225 ; C53.2@69.527,-4.953 69.527,-5.799 *23.75@69.539,-5.811 ; *23.75@69.599,-5.811 *23.75@69.539,-5.811 ; 46.228,38.735 54.531,38.735 ; C46.2@52.07,-19.108 52.07,-17.52 53.274,-16.316 54.094,-16.316 *23.22@54.099,-16.311 56.032,-16.311 56.849,-15.494 ; 56.849,-18.034 56.849,-15.494 ; 56.849,-18.034 57.738,-17.145 66.929,-17.145 67.849,-16.225 ; 56.849,-15.494 56.849,-14.732 ; 56.849,-14.732 56.849,-13.763 ; 56.849,-13.763 56.849,-11.811 ; 66.675,-5.811 *23.75@69.539,-5.811 ; 66.675,-5.811 67.849,-6.985 67.849,-16.225
  Top Layer w0.5: C41.2@44.551,-11.894 45.706,-10.739 51.689,-10.739 52.848,-10.739
  Bottom Layer w0.254: v2(7.747,-5.842) v2(8.382,-5.207) v2(9.017,-4.572) 11.245,-2.344 v2(12.065,-2.344) v2(13.081,-2.344) 13.912,-3.175 v2(23.114,-3.175) ; *25.1@39.497,22.352 42.797,22.352 46.355,18.794 *26.1@46.355,17.272 52.714,17.272 v3(55.446,14.54) ; v2(52.197,0.762) 52.263,0.828 52.263,1.336 v2(54.229,3.302) ; v2(55.499,-23.876) v2(55.499,-22.479)
  other v2: 56.711,-12.954
pads on no net: *9.19 *9.28 *9.31 *9.32 *9.38 *9.44 *13.5 *13.8 *15.S1 *15.S2 *16.S1 *16.S2 *17.S1 *17.S2 *18.S1 *18.S2 *19.S1 *19.S2 *20.S1 *20.S2 *22.S1 *22.S2 *23.5 *23.7 *23.8 *23.9 *23.15 *23.18 *23.25 *23.26 *23.35 *23.36 *23.37 *23.38 *23.39 *23.40 *23.41 *23.42 *23.43 *23.44 *23.45 *23.46 *23.53 *23.54 *23.57 *23.58 *23.59 *23.60 *23.61 *23.62 *23.65 *23.81 *23.82 *23.83 *23.84 *23.85 U1.5
copper on no net:
  other v3: 59.325,8.54 68.906,8.54
  other v5: -74,-36.5 74,-36.5 57.725,4 70.506,4 -74,36.5 74,36.5

## Polygon pours and split planes (outlines as drawn)
Net*2_1 on Top Layer "NET*2_1_L01_P033" (solid, pour order 33): 1.778,-13.462 0.381,-13.462 0.381,-17.145 1.778,-17.145
GND on Top Layer "GND_L01_P048" (solid, remove dead copper, pour order 48): 11.881,1.585 11.881,5.903 19.628,5.903 19.628,0.315 37.408,0.315 37.408,43.546 77.442,43.546 77.442,-43.213 -6.026,-43.213 -6.026,-1.971 8.325,-1.971
Net*3_1 on Top Layer "NET*3_1_L01_P052" (solid, pour order 52): 2.286,-5.461 2.286,-6.223 6.858,-6.223 6.858,-5.461
GND on Top Layer "GND_L01_P050" (solid, remove dead copper, pour order 50): -7.493,25.654 -0.127,25.654 0.889,26.67 0.889,32.004 10.033,32.004 10.033,40.259 -8.382,40.259 -8.382,26.543
OUT+ on Top Layer "OUT+_L01_P051" (solid, remove dead copper, pour order 51): -9.525,42.291 -9.525,26.035 -8.128,24.638 0.508,24.638 1.778,25.908 1.778,31.115 10.033,31.115 10.033,1.016 8.255,-0.762 3.521,-0.762 3.487,-0.796 3.365,-0.674 3.365,1.143 -4.318,1.143 -5.715,2.54 -11.684,2.54 -12.954,1.27 -12.954,-3.81 -11.557,-5.207 -5.334,-5.207 -5.334,-7.493 -6.223,-7.493 -7.62,-8.89 -17.653,-8.89 -17.653,2.54 -78.422,2.54 -78.422,42.291
Connect on Top Layer "CONNECT_L01_P030" (solid, pour order 30): -68.199,7.747 -68.199,-7.62 -52.832,-7.62 -18.923,-7.62 -18.923,7.747
Connect on Top Layer "CONNECT_L01_P049" (solid, pour order 49): -68.199,7.493 -68.199,-7.874 -52.832,-7.874 -18.923,-7.874 -18.923,7.493
Connect on Top Layer "CONNECT_L01_P044" (solid, pour order 44): -3.752,-5.063 -3.752,-6.154 -2.794,-7.112 -0.127,-7.112 -0.127,-5.248 0.058,-5.063
NetC34_1 on Top Layer "NETC34_1_L01_P020" (solid, pour order 20): 40.754,-22.466 40.259,-21.971 40.259,-14.478 42.291,-14.478 42.291,-20.574 41.402,-20.574 41.402,-21.59 41.529,-21.717 42.45,-21.717 42.45,-22.466
BAT+ on Top Layer "BAT+_L01_P041" (solid, pour order 41): 46.101,-20.001 46.101,-21.59 44.958,-21.59 44.958,-23.876 47.879,-23.876 47.879,-20.001
VCC_3V on Top Layer "VCC_3V_L01_P039" (solid, pour order 39): 9.652,-5.334 8.636,-6.35 7.239,-6.35 7.239,-5.715 9.017,-3.937 9.652,-3.937
BAT+ on Top Layer "BAT+_L01_P037" (solid, pour order 37): 7.493,-15.86 2.413,-15.86 2.413,-17.491 -0.077,-17.491 -0.077,-15.748 -2.667,-15.748 -2.667,-19.05 7.493,-19.05
res10w on Top Layer "RES10W_L01_P034" (solid, pour order 34): -12.192,0.381 -11.049,1.524 -6.223,1.524 -4.953,0.254 0.903,0.254 0.903,-4.433 0.891,-4.445 -11.049,-4.445 -12.192,-3.302
Net*9_1 on Top Layer "NET*9_1_L01_P031" (solid, pour order 31): 9.254,-13.97 15.093,-13.97 17.272,-11.791 17.272,-11.43 15.477,-11.43 14.462,-12.445 9.254,-12.445
Net*5_2 on Top Layer "NET*5_2_L01_P032" (solid, pour order 32): 5.08,-15.367 5.08,-11.557 3.81,-10.287 -3.429,-10.287 -3.429,-13.081 2.159,-13.081 2.159,-15.367
GND on Top Layer "GND_L01_P009" (solid, remove dead copper, pour order 9): 11.938,6.985 21.082,6.985 21.082,1.524 35.941,1.524 35.941,39.116 11.938,39.116
BAT+ on Top Layer "BAT+_L01_P018" (solid, pour order 18): 29.21,-29.4 32.956,-29.4 33.782,-30.226 33.782,-39.179 29.21,-39.179
FUSE_OUT on Top Layer "FUSE_OUT_L01_P006" (solid, pour order 6): 32.131,30.494 26.543,30.494 26.543,32.526 32.131,32.526
FUSE_OUT on Top Layer "FUSE_OUT_L01_P007" (solid, pour order 7): 18.669,11.061 29.591,11.061 29.591,23.356 18.669,23.356
VCC_3V on Top Layer "VCC_3V_L01_P022" (solid, pour order 22): 45.466,-15.875 45.466,-17.272 42.799,-17.272 42.799,-13.843 40.132,-13.843 40.132,-10.795 45.466,-10.795
BAT+ on Top Layer "BAT+_L01_P011" (solid, remove dead copper, pour order 11): -18.923,-1.905 -18.923,-13.462 -8.636,-13.462 -8.636,-41.021 -78.422,-41.021 -78.422,-1.905
GND on Bottom Layer "GND_L02_P047" (solid, remove dead copper, pour order 47): 5.842,-2.032 5.842,5.842 19.685,5.842 19.685,0.254 37.465,0.254 37.465,43.485 77.499,43.485 77.499,-43.274 -5.969,-43.274 -5.969,-2.032
BAT+ on Bottom Layer "BAT+_L02_P043" (solid, pour order 43): 47.879,-19.939 47.879,-24.13 43.688,-24.13 35.306,-24.13 35.306,-19.939

## Keep-outs
Keep-Out Layer:
  lines w0.2: -57.017,39.461 35.983,39.461 35.983,42.461 68.983,42.461 68.983,39.461 76.983,39.461 76.983,-39.539 68.983,-39.539 68.983,-42.539 28.983,-42.539 ; -76.956,-39.539 -76.956,39.461 ; -76.956,-39.539 18.796,-39.539 18.796,-42.539 69.044,-42.539 ; -76.956,-39.539 -76.956,39.461 ; -76.956,-39.539 -76.956,39.461 ; -76.956,39.461 36.044,39.461 ; -76.956,39.461 36.044,39.461 ; -76.956,39.461 36.044,39.461 ; 36.044,39.461 36.044,42.461 ; 36.044,39.461 36.044,42.461 ; 36.044,39.461 36.044,42.461 ; 36.044,42.461 69.044,42.461 ; 36.044,42.461 69.044,42.461 ; 36.044,42.461 69.044,42.461 ; 69.044,-42.539 69.044,-39.539 ; 69.044,-42.539 29.044,-42.539 69.044,-42.539 ; 69.044,-42.539 69.044,-39.539 ; 69.044,-42.539 69.044,-39.539 ; 69.044,-39.539 77.044,-39.539 ; 69.044,-39.539 77.044,-39.539 ; 69.044,-39.539 77.044,-39.539 ; 69.044,39.461 77.044,39.461 ; 69.044,39.461 69.044,42.461 ; 69.044,39.461 77.044,39.461 ; 69.044,39.461 69.044,42.461 ; 69.044,39.461 77.044,39.461 ; 69.044,39.461 69.044,42.461 ; 77.044,-39.539 77.044,39.461 ; 77.044,-39.539 77.044,39.461 ; 77.044,-39.539 77.044,39.461

## Other copper
Top Layer:
  pour cut-out: -66.929,-12.7 -66.929,-17.653 -62.611,-17.653 -62.611,-12.7
  pour cut-out: -54.361,-12.687 -54.361,-17.64 -50.043,-17.64 -50.043,-12.687
  pour cut-out: -42.037,-12.7 -42.037,-17.653 -37.719,-17.653 -37.719,-12.7
  pour cut-out: -29.464,-12.7 -29.464,-17.653 -25.146,-17.653 -25.146,-12.7
  pour cut-out: -24.511,17.78 -24.511,12.827 -20.193,12.827 -20.193,17.78
  pour cut-out: -36.957,17.78 -36.957,12.827 -32.639,12.827 -32.639,17.78
  pour cut-out: -49.408,17.793 -49.408,12.84 -45.09,12.84 -45.09,17.793
  pour cut-out: -61.849,17.78 -61.849,12.827 -57.531,12.827 -57.531,17.78
Multi-Layer:
  pour cut-out: 73.87,32.932 cw(c73.87,36.432) 70.37,36.432 cw(c73.87,36.432) 73.87,39.932 cw(c73.87,36.432) 77.37,36.432 cw(c73.87,36.432)
  pour cut-out: 73.87,-40.068 cw(c73.87,-36.568) 70.37,-36.568 cw(c73.87,-36.568) 73.87,-33.068 cw(c73.87,-36.568) 77.37,-36.568 cw(c73.87,-36.568)
  pour cut-out: -74.069,-40.059 cw(c-74.069,-36.559) -77.569,-36.559 cw(c-74.069,-36.559) -74.069,-33.059 cw(c-74.069,-36.559) -70.569,-36.559 cw(c-74.069,-36.559)
  pour cut-out: -73.979,33.014 cw(c-73.979,36.514) -77.479,36.514 cw(c-73.979,36.514) -73.979,40.014 cw(c-73.979,36.514) -70.479,36.514 cw(c-73.979,36.514)

## Silkscreen, mask and mechanical layers (free items; w line width, h text height)
Top Overlay:
  text "USART2" at 37.403,34.481 h1.5
  text "SPI3" at 47.094,34.481 h1.5
  text "DBG" at 55.729,34.479 h1.5
  text "I2C3" at 63.409,34.479 h1.5
  text "TX" at 40.821,32.418 h1 r90
  text "RX" at 41.837,32.364 h1 r90
  text "NSS" at 51.35,31.809 h1 r90
  text "VCC" at 47.287,31.739 h1 r90
  text "VCC" at 38.778,31.696 h1 r90
  text "GND" at 39.794,31.696 h1 r90
  text "VCC" at 55.923,31.696 h1 r90
  text "GND" at 56.939,31.696 h1 r90
  text "GND" at 46.271,31.681 h1 r90
  text "SCK" at 50.334,31.685 h1 r90
  text "SCL" at 65.701,31.682 h1 r90
  text "VCC" at 63.67,31.569 h1 r90
  text "GND" at 64.686,31.569 h1 r90
  text "SDA" at 66.717,31.559 h1 r90
  text "MISO" at 49.318,31.409 h1 r90
  text "MOSI" at 48.302,31.374 h1 r90
  text "SWDIO" at 57.954,30.575 h1 r90
  text "SWCLK" at 58.97,30.293 h1 r90
  text "TX" at 45.392,27.124 h1
  text "RX" at 47.905,27.124 h1
  text "3V3" at 56.919,14.247 h0.7
  text "GND" at 56.873,11.621 h0.7
  text "MISO" at 55.014,7.389 h0.7
  text "OUT+" at -71.589,6.633 h4 r90
  text "STM32F407VET6" at 57.721,-2.48 h1.2
  text "NRST" at 51.121,-6.49 h1.2 r90
  text "H" at 32.129,-11.357 h1
  text "SHUNT" at 31.309,-14.136 h1.2 r90
  text "L" at 32.159,-14.151 h1
  text "BAT+" at -71.801,-14.676 h4 r90
  text "BQ7695201PFBR" at 8.263,-20.96 h1.2
  text "IRQ" at 59.566,-24.374 h1
  text "MOSI" at 61.782,-24.426 h1
  text "NSS" at 64.667,-24.426 h1
  text "VCC" at 67.023,-24.427 h1
  text "CAN" at 52.776,-24.993 h1.2
  text "VBAT" at 31.931,-26.978 h1.5 r90
  text "B3+" at 35.725,-26.978 h1.5 r90
  text "B2+" at 38.281,-27.105 h1.5 r90
  text "B1+" at 40.821,-27.105 h1.5 r90
  text "GND" at 44.361,-27.105 h1.5 r90
  text "MISO" at 59.231,-31.538 h1
  text "SCK" at 61.938,-31.538 h1
  text "CE" at 64.827,-31.539 h1
  text "GND" at 66.995,-31.539 h1
  text "RX" at 64.316,-33.76 h1 r90
  text "VCC" at 66.337,-33.793 h1 r90
  text "TX" at 63.3,-33.834 h1 r90
  text "GND" at 65.321,-33.851 h1 r90
  text "USART3" at 61.909,-35.496 h1.5
  text "CANL" at 51.605,-35.879 h1 r90
  text "CANL" at 57.193,-35.879 h1 r90
  text "CANH" at 52.621,-35.908 h1 r90
  text "CANH" at 58.209,-35.908 h1 r90
Bottom Overlay:
  text "IRQ" at 61.084,-24.374 h1
  text "MOSI" at 63.821,-24.426 h1
  text "NSS" at 66.397,-24.426 h1
  text "VCC" at 68.867,-24.427 h1
  text "MISO" at 61.165,-31.792 h1
  text "SCK" at 63.665,-31.792 h1
  text "CE" at 65.983,-31.793 h1
  text "GND" at 68.895,-31.793 h1
Mechanical 1:
  lines w0.013: -76.956,-39.539 -76.956,39.461 36.044,39.461 36.044,42.461 69.044,42.461 69.044,39.461 77.044,39.461 77.044,-39.539 69.044,-39.539 69.044,-42.539 29.044,-42.539 ; -57.017,39.461 35.983,39.461 35.983,42.461 68.983,42.461 68.983,39.461 76.983,39.461 76.983,-39.539 68.983,-39.539 68.983,-42.539 28.983,-42.539